# Altium PCB PCB1.PcbDoc
Units mil, origin at the board's own origin, x right, y up, seen from the top; angles counter-clockwise.
Board outline 3940.03 x 3420.03 mil, 2 copper layers (Top Layer, Bottom Layer); 76 components, 35 nets, 252 pads, 0 vias.
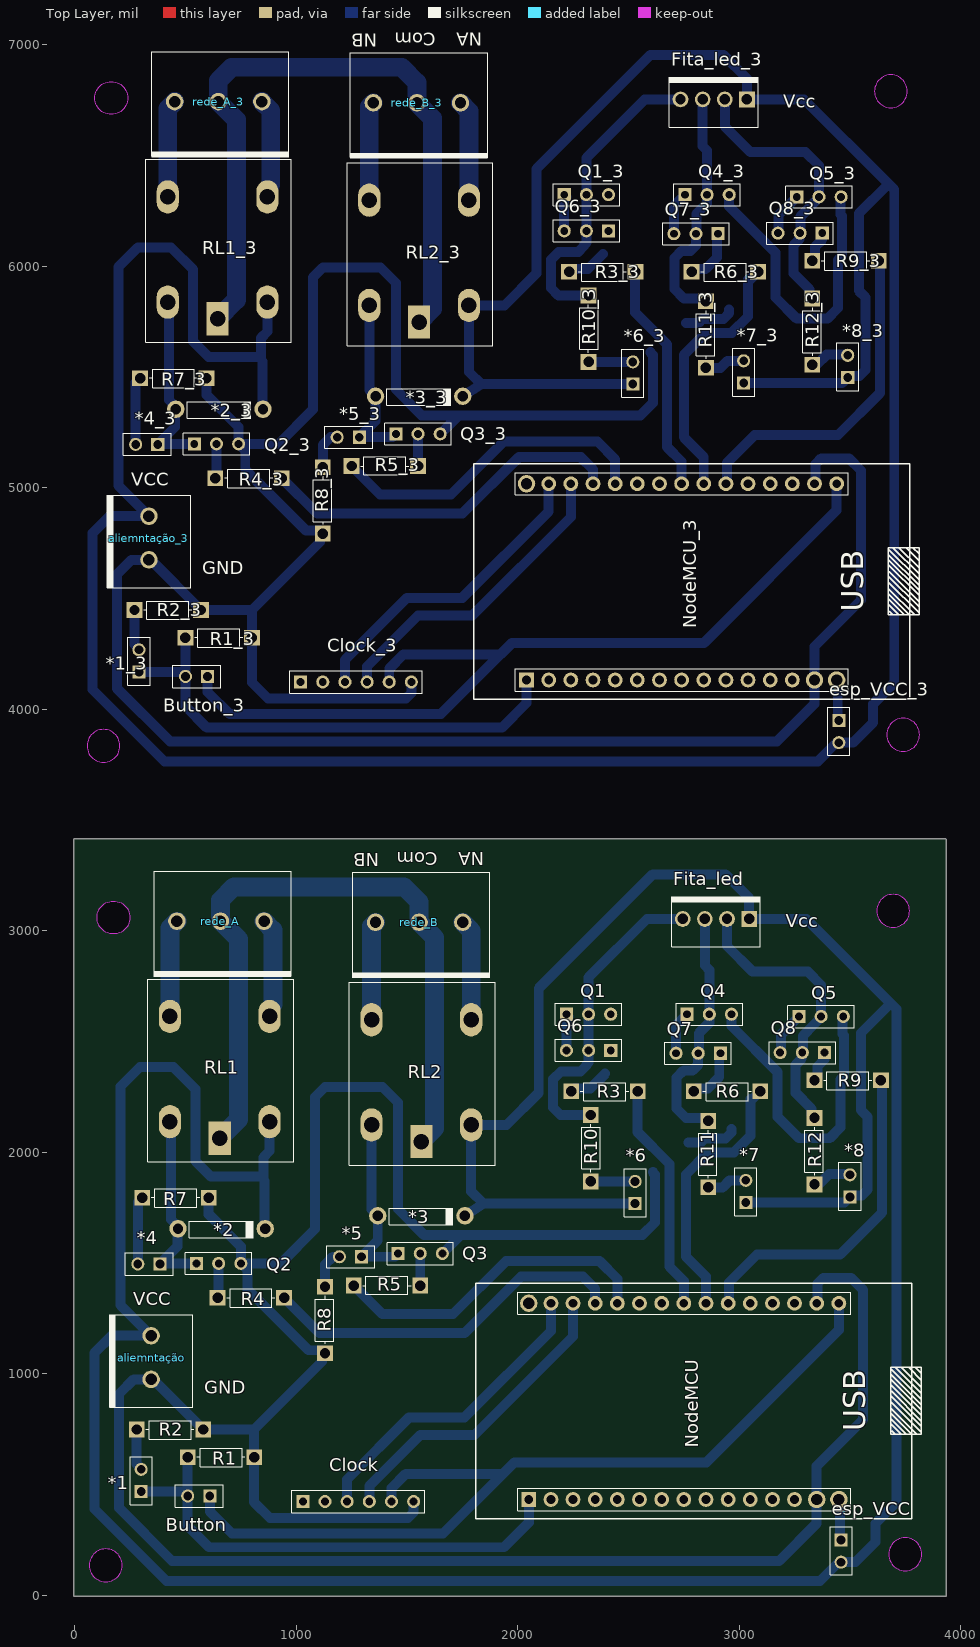
[diagram p0: Top Layer view]
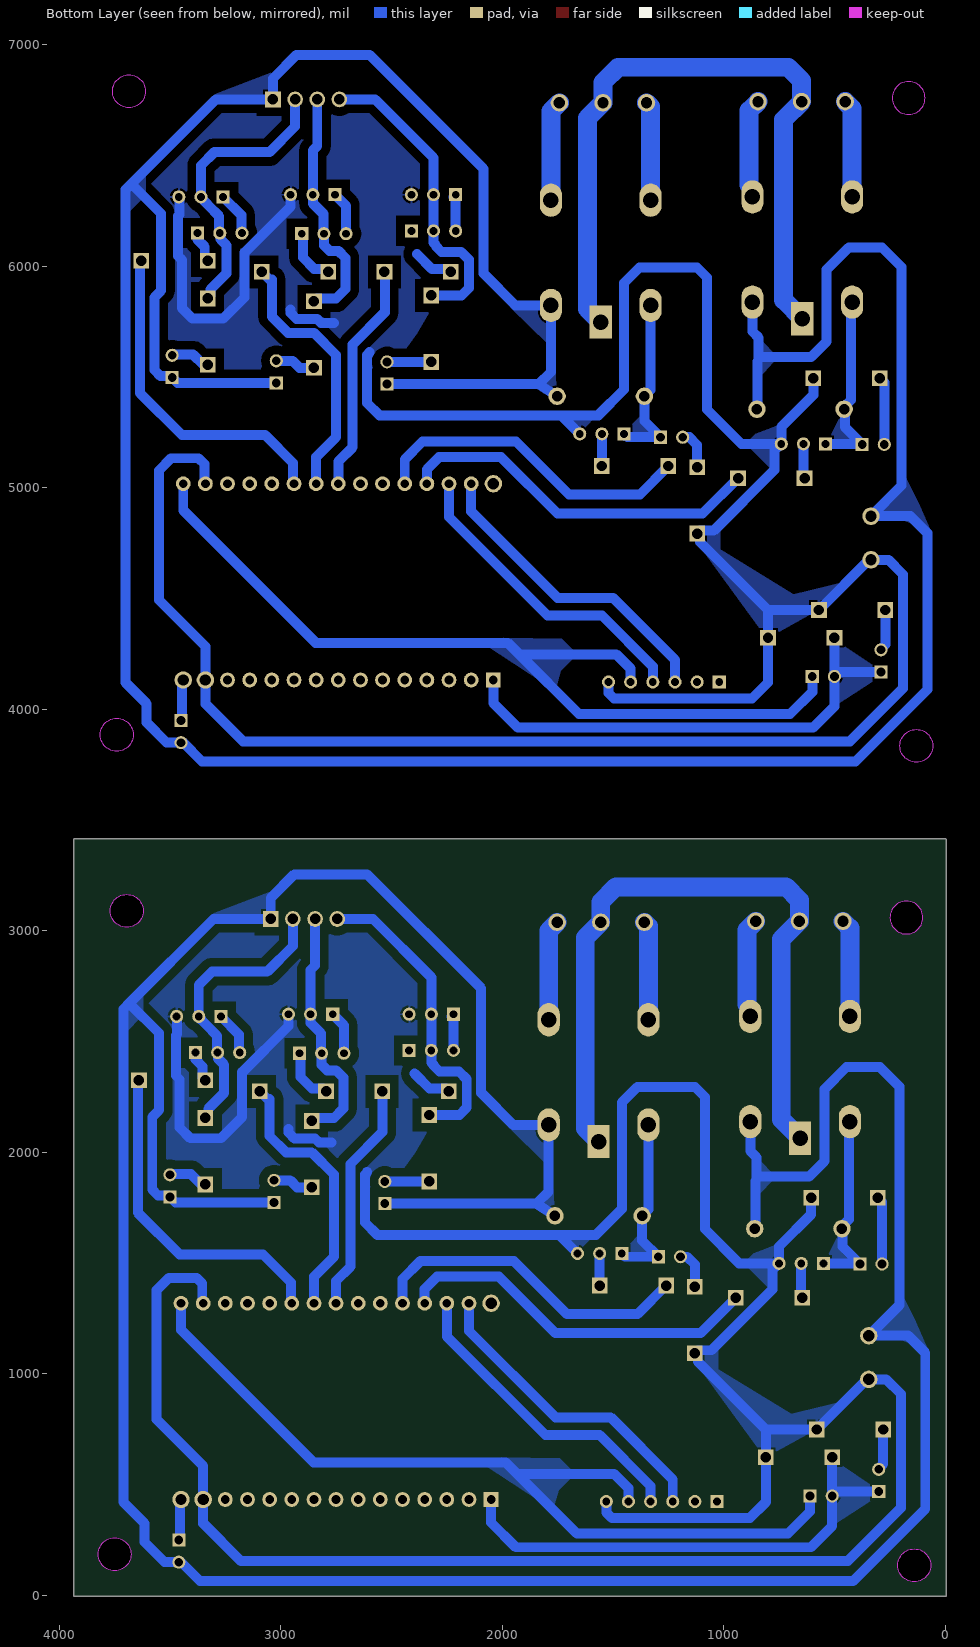
[diagram p1: Bottom Layer view, seen from below]

## Layer stack, top to bottom
Top Solder: solder mask 0.4, Solder Resist, Dk 3.5
Top Layer: signal copper 1.4
Dielectric 1: dielectric 12.6, FR-4, Dk 4.8
Bottom Layer: signal copper 1.4
Bottom Solder: solder mask 0.4, Solder Resist, Dk 3.5

## Board outline
-5.02,0 ccw(c0,0) 0,-5.02 3930,-5.02 ccw(c3930,0) 3935.02,0 3935.01,3410 ccw(c3930,3410) 3930,3415.02 0,3415.02 ccw(c0,3410) -5.02,3410
cut-out: 55.67,3835 ccw(c130,3835) 130,3760.67 ccw(c130,3835) 204.33,3835 ccw(c130,3835) 130,3909.33 ccw(c130,3835)
cut-out: 3665.67,3885 ccw(c3740,3885) 3740,3810.67 ccw(c3740,3885) 3814.33,3885 ccw(c3740,3885) 3740,3959.33 ccw(c3740,3885)
cut-out: 3610.67,6790 ccw(c3685,6790) 3685,6715.67 ccw(c3685,6790) 3759.33,6790 ccw(c3685,6790) 3685,6864.33 ccw(c3685,6790)
cut-out: 165,6685.67 cw(c165,6760) 90.67,6760 cw(c165,6760) 165,6834.33 cw(c165,6760) 239.33,6760 cw(c165,6760)
cut-out: 3610.67,6790 ccw(c3685,6790) 3685,6715.67 ccw(c3685,6790) 3759.33,6790 ccw(c3685,6790) 3685,6864.33 ccw(c3685,6790)
cut-out: 3620.67,3090 ccw(c3695,3090) 3695,3015.67 ccw(c3695,3090) 3769.33,3090 ccw(c3695,3090) 3695,3164.33 ccw(c3695,3090)
cut-out: 175,2985.67 cw(c175,3060) 100.67,3060 cw(c175,3060) 175,3134.33 cw(c175,3060) 249.33,3060 cw(c175,3060)
cut-out: 3620.67,3090 ccw(c3695,3090) 3695,3015.67 ccw(c3695,3090) 3769.33,3090 ccw(c3695,3090) 3695,3164.33 ccw(c3695,3090)
cut-out: 3675.67,185 ccw(c3750,185) 3750,110.67 ccw(c3750,185) 3824.33,185 ccw(c3750,185) 3750,259.33 ccw(c3750,185)
cut-out: 65.67,135 ccw(c140,135) 140,60.67 ccw(c140,135) 214.33,135 ccw(c140,135) 140,209.33 ccw(c140,135)

## Design rules (kind name [scope] priority, off if disabled: settings)
Clearance [All] p1: gap=10 ignorepadtopadclearanceinfootprint=FALSE except(0: Arc-Hole Track-Hole SMDPad-Hole THPad-Hole Via-Hole Fill-Hole Poly-Hole Region-Hole Text-Hole; 20: Fill-Fill Fill-Poly Fill-Region Poly-Poly Poly-Region Region-Region; 40: Arc-Fill Arc-Poly Arc-Region Track-Fill Track-Poly Track-Region SMDPad-Fill SMDPad-Poly SMDPad-Region THPad-Fill THPad-Poly THPad-Region Via-Fill Via-Poly Via-Region)
PolygonConnect [All] p1: connectstyle=Relief reliefconductorwidth=10 reliefentries=4 polygonreliefangle="90 Angle" airgapwidth=10
RoutingVias [All] p1: holewidth=28 width=50 viastyle="Through Hole" minholewidth=28 minwidth=50 maxholewidth=28 maxwidth=50
SolderMaskExpansion [All] p1: expansion=4
Width [All] p1: maxlimit=85 minlimit=10 preferedwidth=45 toplayer_maxwidth=10 toplayer_prefwidth=10 bottomlayer_minwidth=40 minimp=50.000000 maximp=50.000000 favimp=50.000000
30 further rules are at their usual default settings.

## Classes and differential pairs
component class relay_and_led_RGB: *2 *3 *4 *5 *6 *7 *8 Fita_led Q1 Q2 Q3 Q4 Q5 Q6 Q7 Q8 R3 R4 R5 R6 R7 R8 R9 R10 R11 R12 rede_A rede_B RL1 RL2
component class main: *1 aliemntação Button Clock esp_VCC NodeMCU R1 R2

## Components (designator, comment, footprint, x,y, rotation, side; value= is the part's Value field where it differs from the comment)
*1 "LED_AXIAL_5MM" HEADER_1X2 300,518.43 r90 top value=?
*1_3 "LED_AXIAL_5MM" HEADER_1X2 290,4218.43 r90 top value=? (schematic designator *1)
*2 "DIO_PTH_1N4007" DIO_PTH_DO41 663.15,1655 r180 top value=?
*2_3 "DIO_PTH_1N4007" DIO_PTH_DO41 653.15,5355 r180 top value=?
*3 "DIO_PTH_1N4007" DIO_PTH_DO41 1565,1713.43 r180 top value=?
*3_3 "DIO_PTH_1N4007" DIO_PTH_DO41 1555,5413.43 r180 top value=?
*4 "LED_AXIAL_5MM" HEADER_1X2 335,1495.93 r180 top value=?
*4_3 "LED_AXIAL_5MM" HEADER_1X2 325,5195.93 r180 top value=?
*5 "LED_AXIAL_5MM" HEADER_1X2 1245,1528.43 r180 top value=?
*5_3 "LED_AXIAL_5MM" HEADER_1X2 1235,5228.43 r180 top value=?
*6 "LED_AXIAL_5MM" HEADER_1X2 2530,1818.43 r90 top value=?
*6_3 "LED_AXIAL_5MM" HEADER_1X2 2520,5518.43 r90 top value=? (schematic designator *6)
*7 "LED_AXIAL_5MM" HEADER_1X2 3030,1823.43 r90 top value=?
*7_3 "LED_AXIAL_5MM" HEADER_1X2 3020,5523.43 r90 top value=? (schematic designator *7)
*8 "LED_AXIAL_5MM" HEADER_1X2 3500,1848.43 r90 top value=?
*8_3 "LED_AXIAL_5MM" HEADER_1X2 3490,5548.43 r90 top value=? (schematic designator *8)
aliemntação "?" CN_KRE_2 345,1073.43 r270 top
aliemntação_3 "?" CN_KRE_2 335,4773.43 r270 top (schematic designator aliemntação)
Button "?" HEADER_1X2 560,448.43 r180 top
Button_3 "?" HEADER_1X2 550,4148.43 r180 top
Clock "HEADER_1X6" HEADER_1X6 1280,423.43 r0 top value=?
Clock_3 "HEADER_1X6" HEADER_1X6 1270,4123.43 r0 top value=?
esp_VCC "?" HEADER_1X2 3460,199.5 r270 top
esp_VCC_3 "?" HEADER_1X2 3450,3899.5 r270 top (schematic designator esp_VCC)
Fita_led "CN_KK_4" CN_KK_4_5045-4 2895,3053.43 r180 top value=?
Fita_led_3 "CN_KK_4" CN_KK_4_5045-4 2885,6753.43 r180 top value=? (schematic designator Fita_led)
NodeMCU "ESP8266 Development kit" DIV_NodeMCU_Socket 3782.43,341.43 r90 top
NodeMCU_3 "ESP8266 Development kit" DIV_NodeMCU_Socket 3772.43,4041.43 r90 top (schematic designator NodeMCU)
Q1 "NPN" HEADER_1X3 2320,2673.43 r0 top
Q1_3 "NPN" HEADER_1X3 2310,6373.43 r0 top (schematic designator Q1)
Q2 "NPN" HEADER_1X3 650,1548.43 r0 top
Q2_3 "NPN" HEADER_1X3 640,5248.43 r0 top
Q3 "NPN" HEADER_1X3 1560,1593.43 r0 top
Q3_3 "NPN" HEADER_1X3 1550,5293.43 r0 top
Q4 "NPN" HEADER_1X3 2865,2673.43 r0 top
Q4_3 "NPN" HEADER_1X3 2855,6373.43 r0 top (schematic designator Q4)
Q5 "NPN" HEADER_1X3 3370,2663.43 r0 top
Q5_3 "NPN" HEADER_1X3 3360,6363.43 r0 top (schematic designator Q5)
Q6 "NPN" HEADER_1X3 2320,2410 r180 top
Q6_3 "NPN" HEADER_1X3 2310,6110 r180 top (schematic designator Q6)
Q7 "NPN" HEADER_1X3 2815,2397.31 r180 top
Q7_3 "NPN" HEADER_1X3 2805,6097.31 r180 top (schematic designator Q7)
Q8 "NPN" HEADER_1X3 3285,2400 r180 top
Q8_3 "NPN" HEADER_1X3 3275,6100 r180 top (schematic designator Q8)
R1 "1M" RES_PTH_7.62MM 660,623.43 r180 top
R1_3 "1M" RES_PTH_7.62MM 650,4323.43 r180 top (schematic designator R1)
R2 "" RES_PTH_7.62MM 430,748.43 r180 top value=330
R2_3 "" RES_PTH_7.62MM 420,4448.43 r180 top value=330 (schematic designator R2)
R3 "10k" RES_PTH_7.62MM 2391.81,2275 r180 top
R3_3 "10k" RES_PTH_7.62MM 2381.81,5975 r180 top (schematic designator R3)
R4 "10k" RES_PTH_7.62MM 795,1343.43 r180 top
R4_3 "10k" RES_PTH_7.62MM 785,5043.43 r180 top
R5 "10k" RES_PTH_7.62MM 1410,1398.43 r0 top
R5_3 "10k" RES_PTH_7.62MM 1400,5098.43 r0 top
R6 "10k" RES_PTH_7.62MM 2945.07,2275 r180 top
R6_3 "10k" RES_PTH_7.62MM 2935.07,5975 r180 top (schematic designator R6)
R7 "330" RES_PTH_7.62MM 455,1795 r180 top
R7_3 "330" RES_PTH_7.62MM 445,5495 r180 top
R8 "330" RES_PTH_7.62MM 1130,1243.43 r90 top
R8_3 "330" RES_PTH_7.62MM 1120,4943.43 r90 top
R9 "10k" RES_PTH_7.62MM 3490,2325 r180 top
R9_3 "10k" RES_PTH_7.62MM 3480,6025 r180 top (schematic designator R9)
R10 "330" RES_PTH_7.62MM 2330,2018.43 r270 top
R10_3 "330" RES_PTH_7.62MM 2320,5718.43 r270 top (schematic designator R10)
R11 "330" RES_PTH_7.62MM 2860,1991.71 r90 top
R11_3 "330" RES_PTH_7.62MM 2850,5691.71 r90 top (schematic designator R11)
R12 "330" RES_PTH_7.62MM 3340,2005 r90 top
R12_3 "330" RES_PTH_7.62MM 3330,5705 r90 top (schematic designator R12)
rede_A "?" CN_KRE_3 658.15,3043.43 r0 top
rede_A_3 "?" CN_KRE_3 648.15,6743.43 r0 top
rede_B "?" CN_KRE_3 1555,3038.43 r0 top
rede_B_3 "?" CN_KRE_3 1545,6738.43 r0 top
RL1 "RELEICR5551" DIV_RELE_5551 655,2338.43 r270 top
RL1_3 "RELEICR5551" DIV_RELE_5551 645,6038.43 r270 top
RL2 "RELEICR5551" DIV_RELE_5551 1565,2323.43 r270 top
RL2_3 "RELEICR5551" DIV_RELE_5551 1555,6023.43 r270 top

## Footprints (in the part's own frame and the unit in brackets; to place one, negate y for a bottom-side part, rotate by r counter-clockwise, add the part's x,y. Pads: shape width x height; smd on the part's side, far side on the other; paste and mask are expansions set on the pad)
CN_KK_4_5045-4 [mm]
  rect 1.8x1.8 hole 1.2: 1(-3.81,0)
  round 1.8 hole 1.2: 2(-1.27,0) 3(1.27,0) 4(3.81,0)
  silkscreen extent -5.08,-2.54 5.08,3.18, body extent -5.08,-2.84 5.08,6.8, height 12.11
CN_KRE_2 [mm]
  round 2 hole 1.3: 1(-2.5,0) 2(2.5,0)
  silkscreen extent -4.93,-4.75 5.69,4.8, body extent -4.93,-4.7 5.64,4.8, height 15
CN_KRE_3 [mm]
  round 2 hole 1.3: 1(-5,0) 2(0,0) 3(5,0)
  silkscreen extent -7.67,-6.38 8.1,5.74, body extent -7.53,-5.61 8.04,5.59, height 18
DIO_PTH_DO41 [mm]
  round 2 hole 1.2: A(5,0) K(-5,0)
  silkscreen extent -3.62,-0.86 3.69,1.02, body extent -5.65,-1.36 5.71,1.36, height 1.36
DIV_NodeMCU_Socket [mm]
  rect 1.7x1.7 hole 1: 1(2.31,44.004)
  round 1.7 hole 1: 2(2.31,41.464) 3(2.31,38.924) 4(2.31,36.384) 5(2.31,33.844) 6(2.31,31.304) 7(2.31,28.764) 8(2.31,26.224) 9(2.31,23.684) 10(2.31,21.144) 11(2.31,18.604) 12(2.31,16.064) 13(2.31,13.524) 16(24.816,8.444) 17(24.816,10.984) 18(24.816,13.524) 19(24.816,16.064) 20(24.816,18.604) 21(24.816,21.144) 22(24.816,23.684) 23(24.816,26.224) 24(24.816,28.764) 25(24.816,31.304) 26(24.816,33.844) 27(24.816,36.384) 28(24.816,38.924) 29(24.816,41.464)
  round 2 hole 1.3: 14(2.31,10.984) 15(2.31,8.444) 30(24.816,44.004)
  silkscreen extent 0.13,-1 27.13,50.08
DIV_RELE_5551 [mil]
  rect 150x100 hole 70: 1(275,0)
  oval 150x100 hole 70: 2(-275,-225) 3(-275,225) 4(200,225) 5(200,-225)
  silkscreen extent -444,-325 382,333, body extent -425,-310 343,316, height 87
HEADER_1X2 [mm]
  rect 1.5x1.5 hole 1: 1(-1.27,0)
  round 1.5 hole 1: 2(1.27,0)
  silkscreen extent -2.79,-1.27 2.71,1.27, body extent -2.44,-1.34 2.64,1.2, height 8.5
HEADER_1X3 [mm] "Connector; Header; 3x2 Position"
  rect 1.5x1.5 hole 0.9: 1(-2.54,-1.27)
  round 1.5 hole 0.9: 2(0,-1.27) 3(2.54,-1.27)
  silkscreen extent -3.81,-2.54 3.81,0, body extent -3.81,-2.54 3.81,0, height 9.5
HEADER_1X6 [mm] "Connector; Header; 6 Position"
  rect 1.5x1.5 hole 0.9: 1(-6.35,0)
  round 1.5 hole 0.9: 2(-3.81,0) 3(-1.27,0) 4(1.27,0) 5(3.81,0) 6(6.35,0)
  silkscreen extent -7.62,-1.27 7.62,1.27, body extent -7.38,-3.55 7.46,1.48, height 8.56
RES_PTH_7.62MM [mm]
  rect 1.8x1.8 hole 1.2: 1(-3.81,0) 2(3.81,0)
  silkscreen extent -2.76,-1.01 2.76,1.09, body extent -4.06,-1.15 4.16,1.25, height 3.2

## Part data
aliemntação aliemntação_3 esp_VCC esp_VCC_3: library part CN_MKDS_2, "MKDS_2"
Button Button_3: library part HEADER_1X2, "1X2"
Clock Clock_3: "1X6"
Fita_led Fita_led_3: "KK_4"
NodeMCU NodeMCU_3: library part NodeMCU, Reference=https://bennthomsen.files.wordpress.com/2015/12/nodemcu_pinout_700-2.png, Schematic=https://raw.githubusercontent.com/nodemcu/nodemcu-devkit/master/Documents/NODEMCU_DEVKIT_SCH.png
Q1 Q1_3 Q2 Q2_3 Q3 Q3_3 Q4 Q4_3 Q5 Q5_3 Q6 Q6_3 Q7 Q7_3 Q8 Q8_3: "NPN Bipolar Transistor", Code_JEDEC=TO-226-AA, LatestRevisionDate=17-Jul-2002, LatestRevisionNote="Re-released for DXP Platform.", PackageDescription="TO, Flat Index; 3 In-Line, Axial Leads; Body Dia. 4.8mm; Leads 0.55 x 0.51 mm (max)", PackageReference=TO-226-AA, Published=8-Jun-2000, Publisher="Altium Limited"
R1 R1_3 R2 R2_3 R3 R3_3 R4 R4_3 R5 R5_3 R6 R6_3 R7 R7_3 R8 R8_3 R9 R9_3 R10 R10_3 R11 R11_3 R12 R12_3: library part RES_PTH_7.62MM, "Pin Through Hole Resistor 7.62mm"
rede_A rede_A_3 rede_B rede_B_3: library part CN_MKDS_3, "MKDS_3"

## Nets (pads, with @x,y where several pads share a name; then routed paths per layer and width w, separated by ;. In a path a pad name is that pad's centre, name@x,y a point inside that pad or via, vN(x,y) a via of type N, cw(c..) or ccw(c..) an arc to the next point about the centre after c; other vN are vias at no path point)
+3v3: Button.1 Clock.5 NodeMCU.16 | length 4042.4
  Bottom Layer w45: Button.1 610,378.43 710,278.43 1662.97,278.43 1932.97,548.43 ; Clock.5 1430,483.43 1495,548.43 1932.97,548.43 ; NodeMCU.16 3450,1198.43 2852,600.43 1985.3,600.43 1933.3,548.43 1932.97,548.43
+12: *2.K *3.K *6.1 *7.1 *8.1 aliemntação.1 esp_VCC.2 Fita_led.1 RL1.4 RL2.4 | length 15509.9
  Bottom Layer w45: *2.K@856.85,1668.43 856.85,1870 ; RL1.4 880,2005.43 851.85,1977.28 851.85,1890 615,1890 545,1960 545,2285 445,2385 295,2385 207,2297 207,1309.85 aliemntação.1 166.85,1171.85 90,1095 90,390 415,65 3365,65 3450,150 3525,150 3615,240 3615,325 3710,420 3710,2646.43 3681.5,2674.93 ; *3.K 1845,1768.43 ; *6.1 1845,1768.43 ; *7.1 3475,1773.43 *8.1 3507.03,1805.45 3553.64,1805.45 3580,1831.81 3580,2160 3550,2190 3550,2538.43 3681.5,2669.93 3681.5,2674.93 ; 1845,1768.43 1790,1823.43 RL2.4 1950,2123.43 2095,2268.43 2095,2740.28 2609.72,3255 2938.43,3255 3045,3148.43 Fita_led.1 3303,3053.43 3681.5,2674.93
GND: aliemntação.2 Clock.6 NodeMCU.14 NodeMCU.17 Q1.3 Q2.3 Q3.3 Q4.3 Q5.3 R1.1 R2.1 R7.1 R8.1 | length 13723
  Bottom Layer w45: R7.1 605,1720 750,1575 Q2.3 ; Clock.6 1530,373.43 1505,348.43 882,348.43 810,420.43 R1.1 810,748.43 ; Q3.3 1744.06,1627.48 ; 2610,1912.24 2610,1910 2620,1900 2620,1683.43 2564.06,1627.48 1744.06,1627.48 ; 2770,2045 2827.2,2045 2845,2062.8 2938.64,2062.8 2965,2089.16 2965,2105 ; Q4.3 2965,2570.25 3173.75,2361.5 3173.75,2159.68 3270,2063.43 3408.43,2063.43 3456.36,2111.36 3456.36,2329.34 3473.26,2346.25 3473.26,2527.56 3467.31,2533.52 3467.31,2610.74 Q5.3 ; NodeMCU.17 3354.2,1322.62 3354.2,1407.07 3380.56,1433.43 3505,1433.43 3560,1378.43 3560,793.43 3350,583.43 NodeMCU.14 3350,325 3180.43,155.43 439.57,155.43 200,395 200,908.43 266.58,975 aliemntação.2 353.42,975 R2.1 810,748.43 ; Q2.3 780,1468.43 780,1381.43 1055.07,1106.36 1117.07,1106.36 R8.1 1117.07,1080.49 1117.07,1055.49 810,748.43 ; Q2.3 930,1498.43 1085,1653.43 1085,2250 1130,2295 1390,2295 1460,2225 1460,1743.43 1575.94,1627.48 1744.06,1627.48
Net*1_A: *1.1 Button.2 NodeMCU.1 R1.2 | length 2226.3
  Bottom Layer w45: *1.1 486.2,468.43 ; R1.2 Button.2 510,313.43 606.5,216.93 1938.5,216.93 2050,328.43 NodeMCU.1
Net*1_K: *1.2 R2.2 | length 188.3
  Bottom Layer w45: R2.2 280,592.23 300,572.23 *1.2
Net*2_A: *2.A *4.1 Q2.1 RL1.5 | length 795.8
  Bottom Layer w45: *4.1 *4.1@386.25,1497.18 ; RL1.5@435,2083.43 435,1696.58 463.15,1668.43 463.15,1574.08 *4.1@386.25,1497.18 ; Q2.1 548.75,1497.18 *4.1@386.25,1497.18
Net*3_A: *3.A *5.1 Q3.1 RL2.5 | length 808.2
  Bottom Layer w45: RL2.5 1340,1741.58 *3.A 1368.15,1601.58 *5.1 1445,1528.43 Q3.1
Net*4_K: *4.2 R7.2 | length 307.4
  Bottom Layer w45: *4.2 285,1775 R7.2
Net*5_K: *5.2 R8.2 | length 179.5
  Bottom Layer w45: R8.2 1130,1493.43 1165,1528.43 *5.2
Net*6_K: *6.2 R10.2 | length 200
  Bottom Layer w45: R10.2 *6.2
Net*7_K: *7.2 R11.1 | length 183.1
  Bottom Layer w45: R11.1 2925.41,1841.71 2957.12,1873.43 *7.2
Net*8_K: *8.2 R12.1 | length 180.2
  Bottom Layer w45: R12.1 3358.88,1855 3405,1901.12 3497.31,1901.12 *8.2
NetClock_3: Clock.3 NodeMCU.29 | length 1422.5
  Bottom Layer w45: Clock.3 1230,523.43 1510,803.43 1760,803.43 2150,1193.43 NodeMCU.29
NetClock_4: Clock.4 NodeMCU.28 | length 1419.6
  Bottom Layer w45: Clock.4 1330,493.43 1560,723.43 1805,723.43 2250,1168.43 NodeMCU.28
Netesp_VCC_1: esp_VCC.1 NodeMCU.15 | length 187
  Bottom Layer w45: NodeMCU.15 3455,427.38 3455,254.5 esp_VCC.1
NetFita_led_2: Fita_led.2 Q5.2 Q8.2 R12.2 | length 1303.2
  Bottom Layer w45: Fita_led.2 2945,2931.43 3061,2815.43 3310,2815.43 3370,2755.43 Q5.2 3370,2609.62 3337.93,2577.56 3337.93,2576.34 3287.69,2526.1 3287.69,2452.69 Q8.2 3282.31,2447.31 3282.31,2422.31 3255,2395 3255,2268.43 3327.07,2196.36 3327.07,2167.93 R12.2
NetFita_led_3: Fita_led.3 Q4.2 Q7.2 R11.2 | length 1114.6
  Bottom Layer w45: Fita_led.3 2845,2843.43 2865,2823.43 Q4.2 2865,2584.61 2817.69,2537.3 2817.69,2450 Q7.2 2815,2395 2790,2370 2750,2370 2717.49,2337.49 2717.49,2197.12 2759.96,2154.65 2847.07,2154.65 R11.2
NetFita_led_4: Fita_led.4 Q1.2 Q6.2 R10.1 | length 1424.3
  Bottom Layer w45: R10.1 2193.43,2168.43 2160,2201.85 2160,2330 2195,2365 2283.64,2365 2310,2391.36 2310,2396.43 2320,2406.43 Q6.2 Q1.2 2320,2790 2583.43,3053.43 Fita_led.4
NetNodeMCU_21: NodeMCU.21 R9.1 | length 1486.8
  Bottom Layer w45: NodeMCU.21 2954.2,1322.62 2954.2,1412.62 3080,1538.43 3456.07,1538.43 3645,1727.36 R9.1@3645,2297.07
NetNodeMCU_22: NodeMCU.22 R6.1 | length 1206.8
  Bottom Layer w45: NodeMCU.22 2850,1438.43 2760,1528.43 2760,1900.02 2859.98,2000 2976.57,2000 3050,2073.43 3050,2240 3060.07,2240 R6.1
NetNodeMCU_23: NodeMCU.23 R3.1 | length 1043.6
  Bottom Layer w45: R3.1@2540,2275 2540,2092.48 2685,1947.48 2685,1483.43 2750,1418.43 NodeMCU.23
NetNodeMCU_26: NodeMCU.26 R5.1 | length 1485.1
  Bottom Layer w45: R5.1 1388.43,1270 1708.57,1270 1947,1508.43 2370,1508.43 2450,1428.43 NodeMCU.26
NetNodeMCU_27: NodeMCU.27 R4.1 | length 1664.7
  Bottom Layer w45: R4.1 1105,1183.43 1760,1183.43 2015,1438.43 2295,1438.43 2350,1383.43 NodeMCU.27
NetQ1_2: Q1.1 Q6.3 | length 177.6
  Bottom Layer w45: Q6.3 Q1.1 Q1.1@2230,2613.43
NetQ2_2: Q2.2 R4.2 | length 157.1
  Bottom Layer w45: R4.2 650,1348.43 Q2.2
NetQ3_2: Q3.2 R5.2 | length 145
  Bottom Layer w45: R5.2 Q3.2
NetQ4_2: Q4.1 Q7.3 | length 196.8
  Bottom Layer w45: Q7.3 2715,2573.43 Q4.1
NetQ5_2: Q5.1 Q8.3 | length 198.6
  Bottom Layer w45: Q8.3 3187.69,2452.69 3187.69,2531.12 Q5.1
NetQ7_2: Q7.1 R6.2 | length 249.6
  Bottom Layer w45: R6.2 2808,2287.93 2858.64,2287.93 2910,2339.29 Q7.1@2910,2447.31
NetQ8_2: Q8.1 R9.2 | length 143.6
  Bottom Layer w45: R9.2 3352.93,2337.93 3352.93,2387.93 3385,2420 Q8.1
Netrede_A_1: rede_A.1 RL1.2 | length 443
  Bottom Layer w45: RL1.2 RL1.2@430,2653.31
  Bottom Layer w85: RL1.2@430,2653.31 430,3012.13 rede_A.1
Netrede_A_2: rede_A.2 rede_B.2 RL1.1 RL2.1 | length 3229.4
  Bottom Layer w85: RL1.1 740,2148.43 740,2961.58 rede_A.2 658.15,3138.15 718.43,3198.43 1486.57,3198.43 1555,3130 rede_B.2 1625,2968.43 1625,2108.43 RL2.1
Netrede_A_3: rede_A.3 RL1.3 | length 452.8
  Bottom Layer w45: RL1.3 880,2653.31 RL1.3@895,2668.31
  Bottom Layer w85: rede_A.3 895,3003.43 RL1.3@895,2668.31
Netrede_B_1: rede_B.1 RL2.2 | length 447.5
  Bottom Layer w45: RL2.2 RL2.2@1340,2638.31
  Bottom Layer w85: RL2.2@1340,2638.31 1340,3020.28 rede_B.1
Netrede_B_3: rede_B.3 RL2.3 | length 455.8
  Bottom Layer w85: rede_B.3 1790,3000.28 RL2.3
pads on no net: *1_3.1 *1_3.2 *2_3.A *2_3.K *3_3.A *3_3.K *4_3.1 *4_3.2 *5_3.1 *5_3.2 *6_3.1 *6_3.2 *7_3.1 *7_3.2 *8_3.1 *8_3.2 aliemntação_3.1 aliemntação_3.2 Button_3.1 Button_3.2 Clock.1 Clock.2 Clock_3.1 Clock_3.2 Clock_3.3 Clock_3.4 Clock_3.5 Clock_3.6 esp_VCC_3.1 esp_VCC_3.2 Fita_led_3.1 Fita_led_3.2 Fita_led_3.3 Fita_led_3.4 NodeMCU.2 NodeMCU.3 NodeMCU.4 NodeMCU.5 NodeMCU.6 NodeMCU.7 NodeMCU.8 NodeMCU.9 NodeMCU.10 NodeMCU.11 NodeMCU.12 NodeMCU.13 NodeMCU.18 NodeMCU.19 NodeMCU.20 NodeMCU.24 NodeMCU.25 NodeMCU.30 NodeMCU_3.1 NodeMCU_3.2 NodeMCU_3.3 NodeMCU_3.4 NodeMCU_3.5 NodeMCU_3.6 NodeMCU_3.7 NodeMCU_3.8 NodeMCU_3.9 NodeMCU_3.10 NodeMCU_3.11 NodeMCU_3.12 NodeMCU_3.13 NodeMCU_3.14 NodeMCU_3.15 NodeMCU_3.16 NodeMCU_3.17 NodeMCU_3.18 NodeMCU_3.19 NodeMCU_3.20 NodeMCU_3.21 NodeMCU_3.22 NodeMCU_3.23 NodeMCU_3.24 NodeMCU_3.25 NodeMCU_3.26 NodeMCU_3.27 NodeMCU_3.28 NodeMCU_3.29 NodeMCU_3.30 Q1_3.1 Q1_3.2 Q1_3.3 Q2_3.1 Q2_3.2 Q2_3.3 Q3_3.1 Q3_3.2 Q3_3.3 Q4_3.1 Q4_3.2 Q4_3.3 Q5_3.1 Q5_3.2 Q5_3.3 Q6.1 Q6_3.1 Q6_3.2 Q6_3.3 Q7_3.1 Q7_3.2 Q7_3.3 Q8_3.1 Q8_3.2 Q8_3.3 R1_3.1 R1_3.2 R2_3.1 R2_3.2 R3.2 R3_3.1 R3_3.2 R4_3.1 R4_3.2 R5_3.1 R5_3.2 R6_3.1 R6_3.2 R7_3.1 R7_3.2 R8_3.1 R8_3.2 R9_3.1 R9_3.2 R10_3.1 R10_3.2 R11_3.1 R11_3.2 R12_3.1 R12_3.2 rede_A_3.1 rede_A_3.2 rede_A_3.3 rede_B_3.1 rede_B_3.2 rede_B_3.3 RL1_3.1 RL1_3.2 RL1_3.3 RL1_3.4 RL1_3.5 RL2_3.1 RL2_3.2 RL2_3.3 RL2_3.4 RL2_3.5
copper on no net: | length 58771.8
  Bottom Layer w45: 270,4448.43 270,4292.23 290,4272.23 290,4268.43 ; 275,5195.93 275,5475 295,5495 ; 290,4168.43 476.2,4168.43 ; 375,5195.93 376.25,5197.18 ; 420,6313.43 420,6353.31 ; 425,5783.43 425,5396.58 453.15,5368.43 453.15,5274.08 376.25,5197.18 ; 500,4323.43 500,4148.43 500,4013.43 596.5,3916.93 1928.5,3916.93 2040,4028.43 2040,4132.38 ; 540,5198.43 538.75,5197.18 376.25,5197.18 ; 595,5495 595,5420 740,5275 740,5198.43 ; 600,4148.43 600,4078.43 700,3978.43 1652.97,3978.43 1922.97,4248.43 ; 635,5043.43 640,5048.43 640,5198.43 ; 846.85,5368.43 846.85,5570 ; 870,5838.43 870,5705.43 841.85,5677.28 841.85,5590 605,5590 535,5660 535,5985 435,6085 285,6085 197,5997 197,5009.85 335,4871.85 156.85,4871.85 80,4795 80,4090 405,3765 3355,3765 3440,3850 3515,3850 3605,3940 3605,4025 3700,4120 3700,6346.43 3671.5,6374.93 ; 870,6313.43 870,6353.31 885,6368.31 ; 935,5043.43 1095,4883.43 1750,4883.43 2005,5138.43 2285,5138.43 2340,5083.43 2340,5018.43 ; 1120,5093.43 1120,5193.43 1155,5228.43 1185,5228.43 ; 1220,4123.43 1220,4223.43 1500,4503.43 1750,4503.43 2140,4893.43 2140,5018.43 ; 1250,5098.43 1378.43,4970 1698.57,4970 1937,5208.43 2360,5208.43 2440,5128.43 2440,5018.43 ; 1320,4123.43 1320,4193.43 1550,4423.43 1795,4423.43 2240,4868.43 2240,5018.43 ; 1330,5823.43 1330,5441.58 1358.15,5413.43 1358.15,5301.58 1285,5228.43 1435,5228.43 1450,5243.43 ; 1330,6298.43 1330,6338.31 ; 1420,4123.43 1420,4183.43 1485,4248.43 1922.97,4248.43 ; 1520,4123.43 1520,4073.43 1495,4048.43 872,4048.43 800,4120.43 800,4323.43 800,4448.43 ; 1550,5098.43 1550,5243.43 ; 1650,5243.43 1734.06,5327.48 ; 1751.85,5413.43 1835,5468.43 ; 2210,6160 2210,6323.43 2220,6313.43 ; 2231.81,5975 2244.74,5987.93 2317.93,5987.93 2385,6055 ; 2241.81,2275 2254.74,2287.93 2327.93,2287.93 2395,2355 ; 2320,5568.43 2520,5568.43 ; 2320,5868.43 2183.43,5868.43 2150,5901.85 2150,6030 2185,6065 2273.64,6065 2300,6091.36 2300,6096.43 2310,6106.43 2310,6160 2310,6323.43 2310,6490 2573.43,6753.43 2735,6753.43 ; 2520,5468.43 1835,5468.43 ; 2530,5975 2530,5792.48 2675,5647.48 2675,5183.43 2740,5118.43 2740,5018.43 ; 2600,5612.24 2600,5610 2610,5600 2610,5383.43 2554.06,5327.48 1734.06,5327.48 ; 2705,6147.31 2705,6273.43 2755,6323.43 ; 2760,5745 2817.2,5745 2835,5762.8 2928.64,5762.8 2955,5789.16 2955,5805 ; 2785.07,5975 2798,5987.93 2848.64,5987.93 2900,6039.29 2900,6147.31 ; 2835,6753.43 2835,6543.43 2855,6523.43 2855,6323.43 2855,6284.61 2807.69,6237.3 2807.69,6150 2805,6147.31 2805,6095 2780,6070 2740,6070 2707.49,6037.49 2707.49,5897.12 2749.96,5854.65 2837.07,5854.65 2850,5841.71 ; 2840,5018.43 2840,5138.43 2750,5228.43 2750,5600.02 2849.98,5700 2966.57,5700 3040,5773.43 3040,5940 3050.07,5940 3085.07,5975 ; 2850,5541.71 2915.41,5541.71 2947.12,5573.43 3020,5573.43 ; 2935,6753.43 2935,6631.43 3051,6515.43 3300,6515.43 3360,6455.43 3360,6313.43 3360,6309.62 3327.93,6277.56 3327.93,6276.34 3277.69,6226.1 3277.69,6152.69 3275,6150 3272.31,6147.31 3272.31,6122.31 3245,6095 3245,5968.43 3317.07,5896.36 3317.07,5867.93 3330,5855 ; 2940,5018.43 2944.2,5022.62 2944.2,5112.62 3070,5238.43 3446.07,5238.43 3635,5427.36 3635,5997.07 ; 2955,6323.43 2955,6270.25 3163.75,6061.5 3163.75,5859.68 3260,5763.43 3398.43,5763.43 3446.36,5811.36 3446.36,6029.34 3463.26,6046.25 3463.26,6227.56 3457.31,6233.52 3457.31,6310.74 3460,6313.43 ; 3020,5473.43 3465,5473.43 3490,5498.43 3497.03,5505.45 3543.64,5505.45 3570,5531.81 3570,5860 3540,5890 3540,6238.43 3671.5,6369.93 3671.5,6374.93 ; 3175,6150 3177.69,6152.69 3177.69,6231.12 3260,6313.43 ; 3330,5555 3348.88,5555 3395,5601.12 3487.31,5601.12 3490,5598.43 ; 3330,6025 3342.93,6037.93 3342.93,6087.93 3375,6120 3375,6150 ; 3340,5018.43 3344.2,5022.62 3344.2,5107.07 3370.56,5133.43 3495,5133.43 3550,5078.43 3550,4493.43 3340,4283.43 3340,4132.38 3340,4025 3170.43,3855.43 429.57,3855.43 190,4095 190,4608.43 256.58,4675 335,4675 343.42,4675 570,4448.43 800,4448.43 ; 3440,4132.38 3445,4127.38 3445,3954.5 3450,3949.5 ; 3440,5018.43 3440,4898.43 2842,4300.43 1975.3,4300.43 1923.3,4248.43 1922.97,4248.43 ; 740,5198.43 920,5198.43 1075,5353.43 1075,5950 1120,5995 1380,5995 1450,5925 1450,5443.43 1565.94,5327.48 1734.06,5327.48 ; 740,5198.43 770,5168.43 770,5081.43 1045.07,4806.36 1107.07,4806.36 1120,4793.43 1107.07,4780.49 1107.07,4755.49 800,4448.43 ; 1835,5468.43 1780,5523.43 1780,5823.43 1940,5823.43 2085,5968.43 2085,6440.28 2599.72,6955 2928.43,6955 3035,6848.43 3035,6753.43 3293,6753.43 3671.5,6374.93
  Bottom Layer w85: 420,6353.31 420,6712.13 451.3,6743.43 ; 645,5763.43 730,5848.43 730,6661.58 648.15,6743.43 648.15,6838.15 708.43,6898.43 1476.57,6898.43 1545,6830 1545,6738.43 1615,6668.43 1615,5808.43 1555,5748.43 ; 845,6743.43 885,6703.43 885,6368.31 ; 1330,6338.31 1330,6720.28 1348.15,6738.43 ; 1741.85,6738.43 1780,6700.28 1780,6298.43

## Polygon pours and split planes (outlines as drawn)
no net on Bottom Layer "NONET_L02_P193" (solid, remove dead copper, pour order 193): 1757.97,4083.43 1760,4085.46 1735,4173.43 1660,4248.43 1923.3,4248.43
no net on Bottom Layer "NONET_L02_P191" (solid, remove dead copper, pour order 191): 1660,4248.43 1730,4318.43 2000,4323.43 1950,4263.43
no net on Bottom Layer "NONET_L02_P189" (solid, remove dead copper, pour order 189): 1780,4098.43 1982,4300.43 2090,4300.43
no net on Bottom Layer "NONET_L02_P187" (solid, remove dead copper, pour order 187): 800,4323.43 800,4448.43 570,4448.43
no net on Bottom Layer "NONET_L02_P185" (solid, remove dead copper, pour order 185): 800,4315 800,4473.43 1135,4775
no net on Bottom Layer "NONET_L02_P183" (solid, remove dead copper, pour order 183): 1082.88,4763.02 789.88,4450.59 571.74,4450.59
no net on Bottom Layer "Bottom Layer-+12" (solid, remove dead copper, pour order 181): 65,4805 122.5,4935 180,5050 313.75,4901.25
no net on Bottom Layer "NONET_L02_P179" (solid, remove dead copper, pour order 179): 1005,4690 1015,4700 1015,4830 1051.57,4793.43 1120,4793.43 1120,4779.79 1070.21,4730
no net on Bottom Layer "NONET_L02_P177" (solid, remove dead copper, pour order 177): 500,4013.43 270.71,4161.32 500,4315.9
no net on Bottom Layer "NONET_L02_P175" (solid, remove dead copper, pour order 175): 432.43,4580.55 575,4448.43 866.35,4475.17
no net on Bottom Layer "NONET_L02_P173" (solid, remove dead copper, pour order 173): 3310,6768.32 3287.5,6782.5 3040,6875 3035,6753.43
no net on Bottom Layer "NONET_L02_P171" (solid, remove dead copper, pour order 171): 3700,6230 3610,6320 3610,6436.43 3623.57,6436.43 3695,6365
no net on Bottom Layer "NONET_L02_P169" (solid, remove dead copper, pour order 169): 755,5590 835,5670 840,5670 840,5496.85 846.85,5490
no net on Bottom Layer "NONET_L02_P167" (solid, remove dead copper, pour order 167): 538.75,5197.18 432.82,5197.18 420,5210 456.3,5246.3 456.3,5355
no net on Bottom Layer "NONET_L02_P165" (solid, remove dead copper, pour order 165): 770,5081.43 783,5081.43 900,5198.43 855,5243.43 800,5265 744.8,5286.65
no net on Bottom Layer "NONET_L02_P163" (solid, remove dead copper, pour order 163): 1374.37,5325.63 1456.57,5243.43 1310,5243.43 1295,5228.43 1285,5228.43
no net on Bottom Layer "NONET_L02_P161" (solid, remove dead copper, pour order 161): 1650,5243.43 1650,5250 1580,5320 1580,5327.48 1707.48,5327.48 1710,5330
no net on Bottom Layer "NONET_L02_P159" (solid, remove dead copper, pour order 159): 1751.85,5413.43 1760,5540 1825,5470
no net on Bottom Layer "NONET_L02_P157" (solid, remove dead copper, pour order 157): 1965,5818.5 1789.77,5644.77 1780,5665 1780,5823.43
no net on Bottom Layer "NONET_L02_P155" (solid, remove dead copper, pour order 155): 2385,5695 2620,5383.43 3386.5,5175 3810,5598.5 3810,6480.5 3395.5,6895 1964.12,6895 2020.45,6325.43
GND on Bottom Layer "GND_L02_P073" (solid, remove dead copper, pour order 73): 2395,1995 2630,1683.43 3396.5,1475 3820,1898.5 3820,2780.5 3405.5,3195 1974.12,3195 2030.45,2625.43
+12 on Bottom Layer "+12_L02_P071" (solid, remove dead copper, pour order 71): 1975,2118.5 1799.77,1944.77 1790,1965 1790,2123.43
no net on Bottom Layer "Bottom Layer-No Net 6" (solid, pour order 69): 1760,1780
+12 on Bottom Layer "+12_L02_P067" (solid, remove dead copper, pour order 67): 1761.85,1713.43 1770,1840 1835,1770
GND on Bottom Layer "GND_L02_P065" (solid, remove dead copper, pour order 65): 1660,1543.43 1660,1550 1590,1620 1590,1627.48 1717.48,1627.48 1720,1630
Net*3_A on Bottom Layer "NET*3_A_L02_P063" (solid, remove dead copper, pour order 63): 1384.37,1625.63 1466.57,1543.43 1320,1543.43 1305,1528.43 1295,1528.43
GND on Bottom Layer "GND_L02_P061" (solid, remove dead copper, pour order 61): 780,1381.43 793,1381.43 910,1498.43 865,1543.43 810,1565 754.8,1586.65
Net*2_A on Bottom Layer "NET*2_A_L02_P055" (solid, remove dead copper, pour order 55): 548.75,1497.18 442.82,1497.18 430,1510 466.3,1546.3 466.3,1655
+12 on Bottom Layer "+12_L02_P051" (solid, remove dead copper, pour order 51): 765,1890 845,1970 850,1970 850,1796.85 856.85,1790
+12 on Bottom Layer "+12_L02_P049" (solid, remove dead copper, pour order 49): 3710,2530 3620,2620 3620,2736.43 3633.57,2736.43 3705,2665
no net on Bottom Layer "Bottom Layer-No Net 7" (solid, pour order 45): 3610,2595
+12 on Bottom Layer "+12_L02_P041" (solid, remove dead copper, pour order 41): 3320,3068.32 3297.5,3082.5 3050,3175 3045,3053.43
GND on Bottom Layer "GND_L02_P040" (solid, remove dead copper, pour order 40): 442.43,880.55 585,748.43 876.35,775.17
Net*1_A on Bottom Layer "NET*1_A_L02_P038" (solid, remove dead copper, pour order 38): 510,313.43 280.71,461.32 510,615.9
no net on Bottom Layer "Bottom Layer-No Net" (solid, pour order 36): 300,468.43
GND on Bottom Layer "GND_L02_P034" (solid, remove dead copper, pour order 34): 1015,990 1025,1000 1025,1130 1061.57,1093.43 1130,1093.43 1130,1079.79 1080.21,1030
no net on Bottom Layer "Bottom Layer-No Net 1" (solid, pour order 30): 1005,990
+12 on Bottom Layer "Bottom Layer-+12" (solid, remove dead copper, pour order 26): 75,1105 132.5,1235 190,1350 323.75,1201.25
no net on Bottom Layer "Bottom Layer-No Net 2" (solid, pour order 24): 207,1309.85
no net on Bottom Layer "Bottom Layer-No Net 3" (solid, pour order 22): 345,975
GND on Bottom Layer "GND_L02_P020" (solid, remove dead copper, pour order 20): 1092.88,1063.02 799.88,750.59 581.74,750.59
no net on Bottom Layer "Bottom Layer-No Net 4" (solid, pour order 18): 580,748.43
GND on Bottom Layer "GND_L02_P016" (solid, remove dead copper, pour order 16): 810,615 810,773.43 1145,1075
GND on Bottom Layer "GND_L02_P014" (solid, remove dead copper, pour order 14): 810,623.43 810,748.43 580,748.43
+3v3 on Bottom Layer "+3V3_L02_P006" (solid, remove dead copper, pour order 6): 1790,398.43 1992,600.43 2100,600.43
no net on Bottom Layer "Bottom Layer-No Net 5" (solid, pour order 4): 1930,485
+3v3 on Bottom Layer "+3V3_L02_P002" (solid, remove dead copper, pour order 2): 1670,548.43 1740,618.43 2010,623.43 1960,563.43
+3v3 on Bottom Layer "+3V3_L02_P000" (solid, remove dead copper, pour order 0): 1767.97,383.43 1770,385.46 1745,473.43 1670,548.43 1933.3,548.43
no net on Top Overlay (solid): 3045,3158.67

## Silkscreen, mask and mechanical layers (free items; w line width, h text height)
Top Overlay:
  text "Com" at 1630,7055 h60 r180
  text "NA" at 1840,7055 h60 r180
  text "NB" at 1365,7050 h60 r180
  text "Vcc" at 3200,6715.67 h60
  text "VCC" at 255,5010 h60
  text "GND" at 575,4610 h60
  text "USB" at 3560,4440 h99.37 r90
  text "Com" at 1640,3355 h60 r180
  text "NA" at 1850,3355 h60 r180
  text "NB" at 1375,3350 h60 r180
  text "Vcc" at 3210,3015.67 h60
  text "VCC" at 265,1310 h60
  text "GND" at 585,910 h60
  text "USB" at 3570,740 h99.37 r90
Mechanical 1:
  circle w10: c3740,3885 r74.33
  circle w10: c3685,6790 r74.33
  circle w10: c165,6760 r74.33
  circle w10: c130,3835 r74.33
  circle w10: c140,135 r74.33
  circle w10: c175,3060 r74.33
  circle w10: c3695,3090 r74.33
  circle w10: c3750,185 r74.33
  lines w10: -10,3700 3920,3700 3920,7110 -10,7110 -10,3700 ; 0,0 0,3410 3930,3410 3930,0 0,0

## Dimensions
0,0 to 0,3410 on Mechanical 13
0,0 to 3930,0 on Mechanical 13